# Altium PCB MotorDriverBoard.PcbDoc (part 1 of 2)
Units mm, origin at the board's own origin, x right, y up, seen from the top; angles counter-clockwise.
Board outline 100 x 50 mm, 2 copper layers (Top Layer, Bottom Layer), stack 1.571 mm thick; 192 components, 176 nets, 653 pads, 1194 vias.
Unrouted connection lines stored in the file: 1.
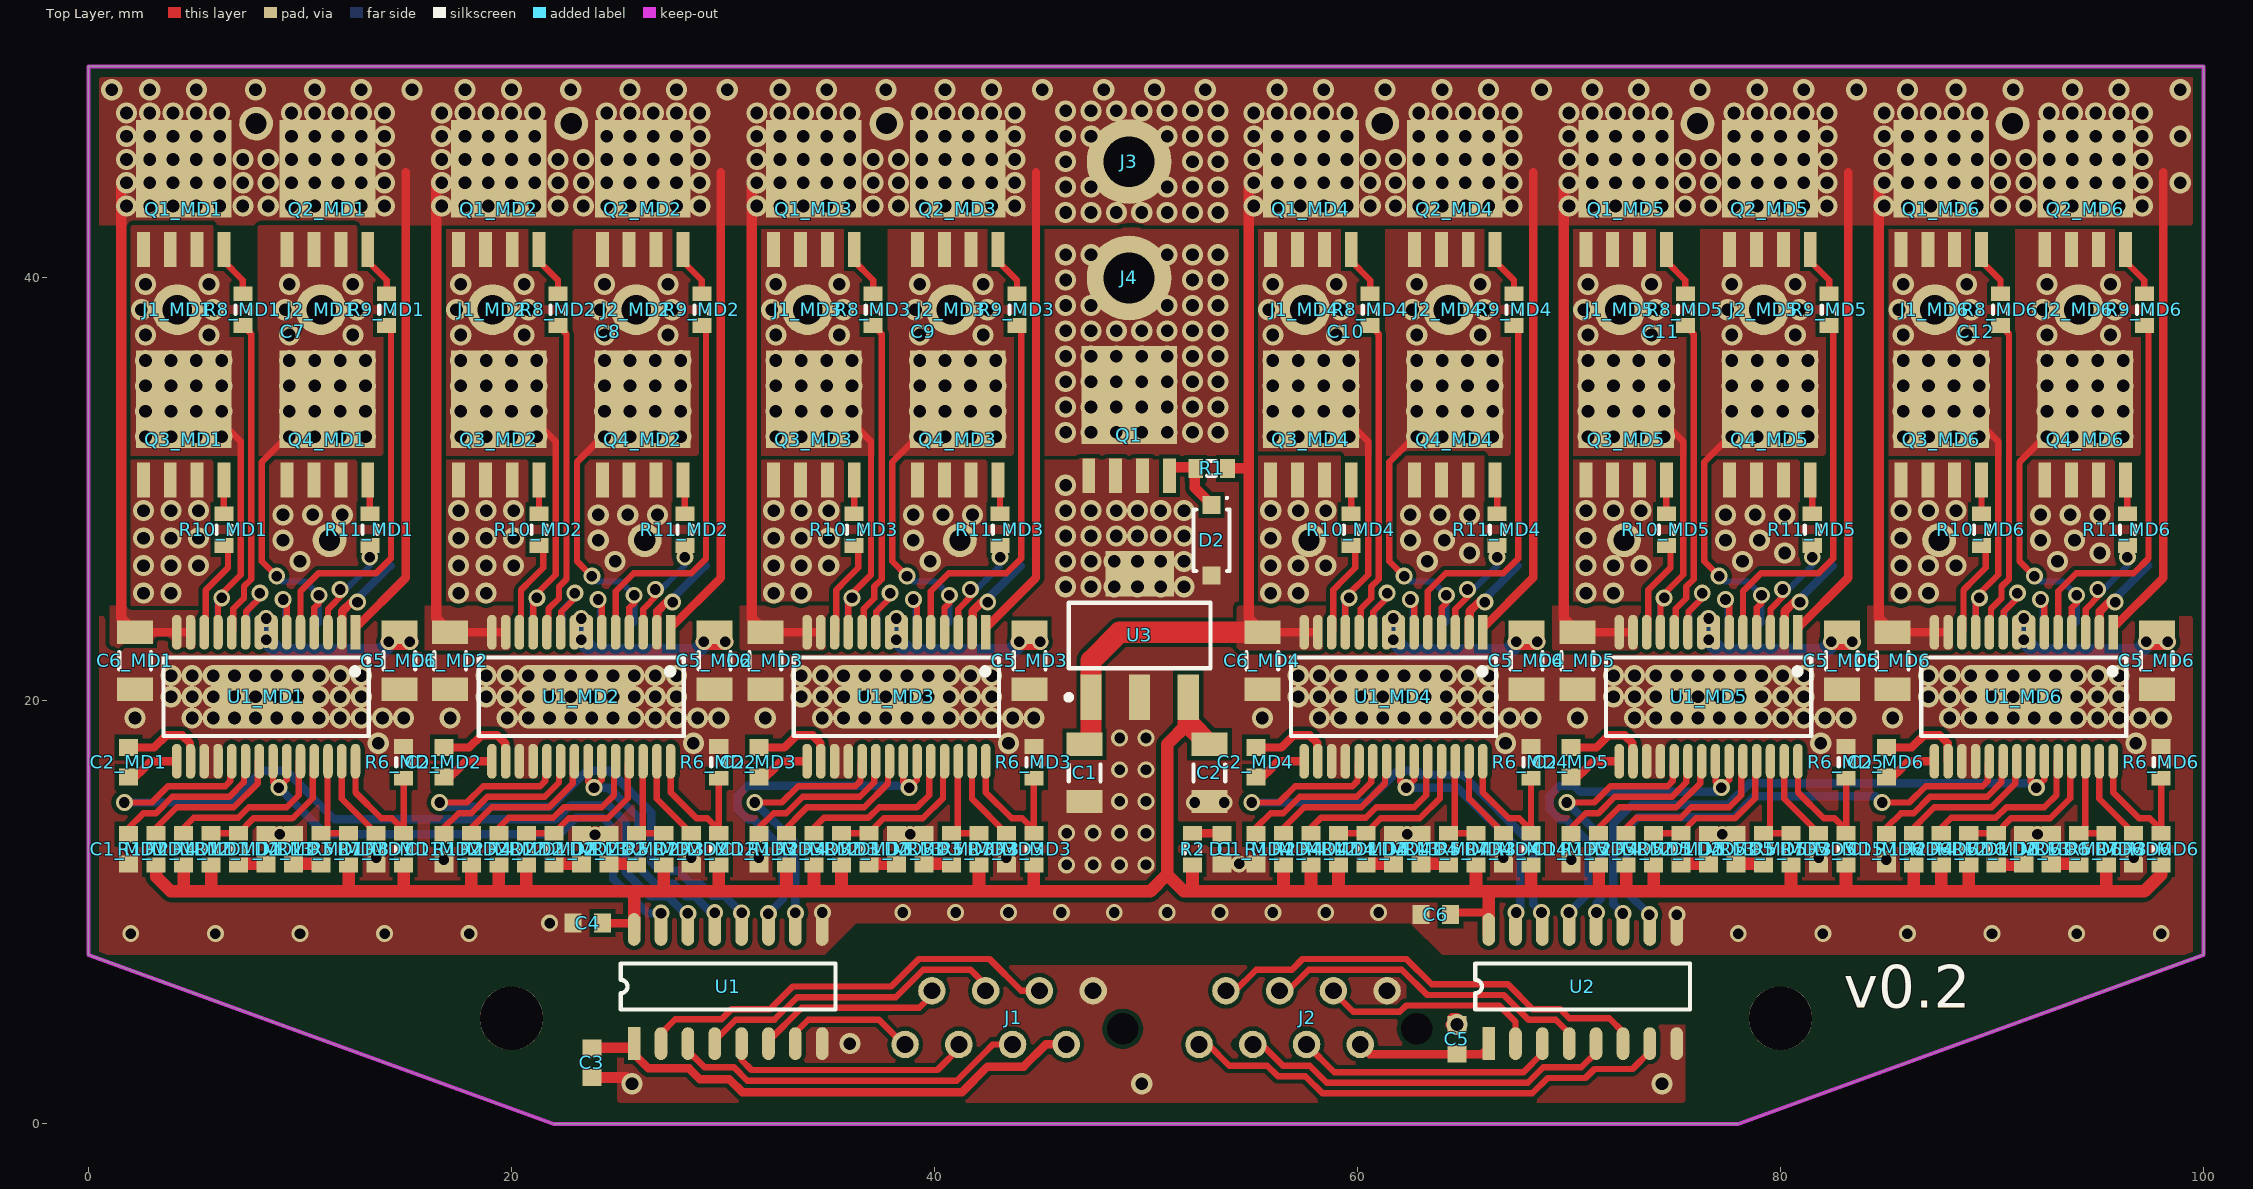
[diagram p0: Top Layer view]
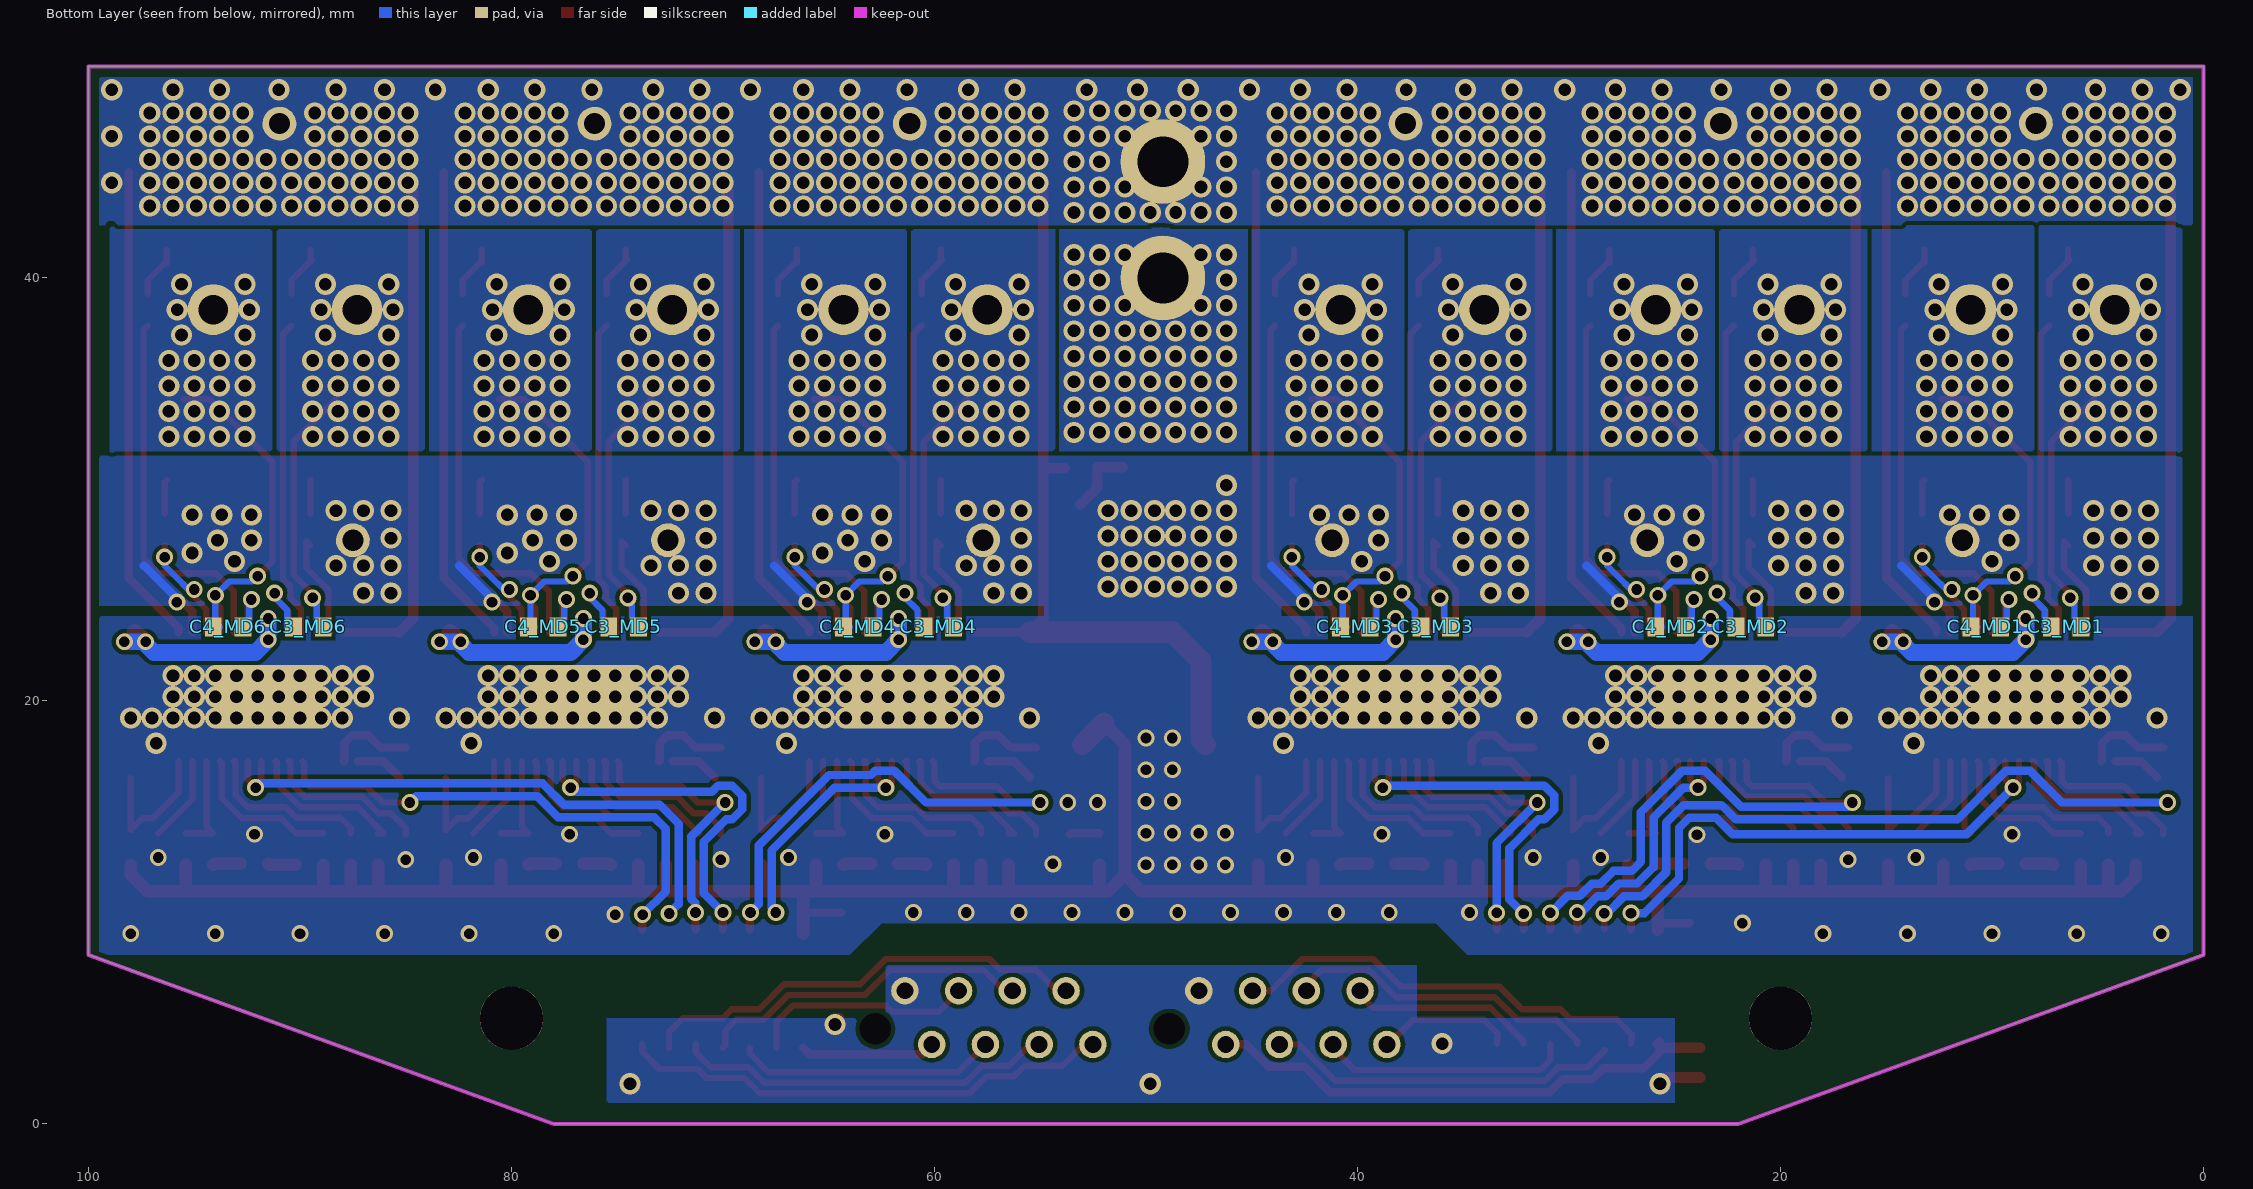
[diagram p1: Bottom Layer view, seen from below]

## Layer stack, top to bottom
Top Solder: solder mask 0.0102, Solder Resist, Dk 3.5
Top Layer: signal copper 0.0356
Dielectric 1: dielectric 1.5, FR-4, Dk 4.8
Bottom Layer: signal copper 0.0356
Bottom Solder: solder mask 0.0102, Solder Resist, Dk 3.5

## Board outline
78,0 100,8 100,50 0,50 0,8 22,0 78,0

## Design rules (kind name [scope] priority, off if disabled: settings)
Clearance Clearance_GND [InNet('GND') vs InNet('GND-EXT')] p1: gap=0.2 except(1: Poly-Poly Fill-Fill Fill-Poly)
Clearance [All] p2: gap=0.2
HoleSize [All] p1: absolutevalues=TRUE maxlimit=3 minlimit=0.4 maxpercent=80.000 minpercent=20.000
HoleToHoleClearance [All] p1: gap=0.2 allowstackedmicrovias=TRUE
MinimumSolderMaskSliver [All] p1: minsoldermaskwidth=0.2
PlaneConnect [All] p1: planeconnectstyle=Direct reliefexpansion=0.508 reliefentries=4 reliefconductorwidth=0.254 reliefairgap=0.254
PolygonConnect [All] p1: connectstyle=Direct reliefconductorwidth=0.254 reliefentries=4 polygonreliefangle="90 Angle" airgapwidth=0.254
RoomDefinition MotorDrivers [InComponentClass('MotorDrivers')] p1: confinementstyle=ConfineIn formatcopy=TRUE lockcomponents=FALSE outline 0,0 100,0 100,50 0,50
RoomDefinition MD6 [InComponentClass('MD6')] p2: confinementstyle=ConfineIn formatcopy=TRUE lockcomponents=FALSE outline 84.1,11.7 99,11.7 99,49 84.1,49
RoomDefinition MD5 [InComponentClass('MD5')] p3: confinementstyle=ConfineIn formatcopy=TRUE lockcomponents=FALSE outline 69.2,11.7 84.1,11.7 84.1,49 69.2,49
RoomDefinition MD4 [InComponentClass('MD4')] p4: confinementstyle=ConfineIn formatcopy=TRUE lockcomponents=FALSE outline 54.3,11.7 69.2,11.7 69.2,48.9 54.3,48.9
RoomDefinition MD3 [InComponentClass('MD3')] p5: confinementstyle=ConfineIn formatcopy=TRUE lockcomponents=FALSE outline 30.8,49 30.8,11.7 45.7,11.7 45.7,49
RoomDefinition MD2 [InComponentClass('MD2')] p6: confinementstyle=ConfineIn formatcopy=TRUE lockcomponents=FALSE outline 15.9,49 15.9,11.7 30.8,11.7 30.8,49
RoomDefinition MD1 [InComponentClass('MD1')] p7: confinementstyle=ConfineIn formatcopy=TRUE lockcomponents=FALSE outline 1,49 1,11.7 15.9,11.7 15.9,49
RoutingVias [All] p1: holewidth=0.4 width=0.8 viastyle="Through Hole" minholewidth=0.4 minwidth=0.8 maxholewidth=1 maxwidth=2
SolderMaskExpansion SolderMaskExpansion_Via [IsVia And (Not IsTestpoint)] p1: expansion=-5
SolderMaskExpansion [All] p2: expansion=0.1
UnpouredPolygon [All] p1: allowunpoured=FALSE
Width Width_Power [(InNet('GND') OR InNet('VCC'))] p1: maxlimit=1 minlimit=0.3 preferedwidth=0.5 minimp=50.000000 maximp=50.000000 favimp=50.000000
Width [All] p2: maxlimit=1 minlimit=0.3 preferedwidth=0.4 minimp=50.000000 maximp=50.000000 favimp=50.000000
25 further rules are at their usual default settings.

## Classes and differential pairs
channel class SingleDriver: MD1 MD2 MD3 MD4 MD5 MD6
component class MotorDrivers: C1 C2 C3 C4 C5 C6 C7 C8 C9 C10 C11 C12 D1 D2 J1 J2 J3 J4 Q1 R1 R2 U1 U2 U3
component class MD6: C1_MD6 C2_MD6 C3_MD6 C4_MD6 C5_MD6 C6_MD6 D1_MD6 D2_MD6 J1_MD6 J2_MD6 Q1_MD6 Q2_MD6 Q3_MD6 Q4_MD6 R1_MD6 R2_MD6 R3_MD6 R4_MD6 R5_MD6 R6_MD6 R7_MD6 R8_MD6 R9_MD6 R10_MD6 R11_MD6 R12_MD6 R13_MD6 U1_MD6
component class MD5: C1_MD5 C2_MD5 C3_MD5 C4_MD5 C5_MD5 C6_MD5 D1_MD5 D2_MD5 J1_MD5 J2_MD5 Q1_MD5 Q2_MD5 Q3_MD5 Q4_MD5 R1_MD5 R2_MD5 R3_MD5 R4_MD5 R5_MD5 R6_MD5 R7_MD5 R8_MD5 R9_MD5 R10_MD5 R11_MD5 R12_MD5 R13_MD5 U1_MD5
component class MD4: C1_MD4 C2_MD4 C3_MD4 C4_MD4 C5_MD4 C6_MD4 D1_MD4 D2_MD4 J1_MD4 J2_MD4 Q1_MD4 Q2_MD4 Q3_MD4 Q4_MD4 R1_MD4 R2_MD4 R3_MD4 R4_MD4 R5_MD4 R6_MD4 R7_MD4 R8_MD4 R9_MD4 R10_MD4 R11_MD4 R12_MD4 R13_MD4 U1_MD4
component class MD3: C1_MD3 C2_MD3 C3_MD3 C4_MD3 C5_MD3 C6_MD3 D1_MD3 D2_MD3 J1_MD3 J2_MD3 Q1_MD3 Q2_MD3 Q3_MD3 Q4_MD3 R1_MD3 R2_MD3 R3_MD3 R4_MD3 R5_MD3 R6_MD3 R7_MD3 R8_MD3 R9_MD3 R10_MD3 R11_MD3 R12_MD3 R13_MD3 U1_MD3
component class MD2: C1_MD2 C2_MD2 C3_MD2 C4_MD2 C5_MD2 C6_MD2 D1_MD2 D2_MD2 J1_MD2 J2_MD2 Q1_MD2 Q2_MD2 Q3_MD2 Q4_MD2 R1_MD2 R2_MD2 R3_MD2 R4_MD2 R5_MD2 R6_MD2 R7_MD2 R8_MD2 R9_MD2 R10_MD2 R11_MD2 R12_MD2 R13_MD2 U1_MD2
component class MD1: C1_MD1 C2_MD1 C3_MD1 C4_MD1 C5_MD1 C6_MD1 D1_MD1 D2_MD1 J1_MD1 J2_MD1 Q1_MD1 Q2_MD1 Q3_MD1 Q4_MD1 R1_MD1 R2_MD1 R3_MD1 R4_MD1 R5_MD1 R6_MD1 R7_MD1 R8_MD1 R9_MD1 R10_MD1 R11_MD1 R12_MD1 R13_MD1 U1_MD1

## Components (designator, comment, footprint, x,y, rotation, side; value= is the part's Value field where it differs from the comment)
C1 "4.7uF" C1206 47.1,16.6 r90 top
C1_MD1 "100nF" 1608[0603] 1.9,13 r90 top (schematic designator C1)
C1_MD2 "100nF" 1608[0603] 16.8,13 r90 top (schematic designator C1)
C1_MD3 "100nF" 1608[0603] 31.7,13 r90 top (schematic designator C1)
C1_MD4 "100nF" 1608[0603] 55.2,13 r90 top (schematic designator C1)
C1_MD5 "100nF" 1608[0603] 70.1,13 r90 top (schematic designator C1)
C1_MD6 "100nF" 1608[0603] 85,13 r90 top (schematic designator C1)
C2 "4.7uF" C1206 53,16.6 r90 top
C2_MD1 "470nF" 1608[0603] 1.9,17.1 r270 top (schematic designator C2)
C2_MD2 "470nF" 1608[0603] 16.8,17.1 r270 top (schematic designator C2)
C2_MD3 "470nF" 1608[0603] 31.7,17.1 r270 top (schematic designator C2)
C2_MD4 "470nF" 1608[0603] 55.2,17.1 r270 top (schematic designator C2)
C2_MD5 "470nF" 1608[0603] 70.1,17.1 r270 top (schematic designator C2)
C2_MD6 "470nF" 1608[0603] 85,17.1 r270 top (schematic designator C2)
C3 "100nF" 1608[0603] 23.8,2.9 r270 top
C3_MD1 "100nF" 1608[0603] 6.5,23.5 r180 bottom (schematic designator C3)
C3_MD2 "100nF" 1608[0603] 21.4,23.5 r180 bottom (schematic designator C3)
C3_MD3 "100nF" 1608[0603] 36.3,23.5 r180 bottom (schematic designator C3)
C3_MD4 "100nF" 1608[0603] 59.8,23.5 r180 bottom (schematic designator C3)
C3_MD5 "100nF" 1608[0603] 74.7,23.5 r180 bottom (schematic designator C3)
C3_MD6 "100nF" 1608[0603] 89.6,23.5 r180 bottom (schematic designator C3)
C4 "100nF" 1608[0603] 23.6,9.5 r180 top
C4_MD1 "100nF" 1608[0603] 10.3,23.5 r0 bottom (schematic designator C4)
C4_MD2 "100nF" 1608[0603] 25.2,23.5 r0 bottom (schematic designator C4)
C4_MD3 "100nF" 1608[0603] 40.1,23.5 r0 bottom (schematic designator C4)
C4_MD4 "100nF" 1608[0603] 63.6,23.5 r0 bottom (schematic designator C4)
C4_MD5 "100nF" 1608[0603] 78.5,23.5 r0 bottom (schematic designator C4)
C4_MD6 "100nF" 1608[0603] 93.4,23.5 r0 bottom (schematic designator C4)
C5 "100nF" 1608[0603] 64.7,4 r90 top
C5_MD1 "10uF" C1206 14.7,21.9 r90 top (schematic designator C5)
C5_MD2 "10uF" C1206 29.6,21.9 r90 top (schematic designator C5)
C5_MD3 "10uF" C1206 44.5,21.9 r90 top (schematic designator C5)
C5_MD4 "10uF" C1206 68,21.9 r90 top (schematic designator C5)
C5_MD5 "10uF" C1206 82.9,21.9 r90 top (schematic designator C5)
C5_MD6 "10uF" C1206 97.8,21.9 r90 top (schematic designator C5)
C6 "100nF" 1608[0603] 63.7,9.9 r180 top
C6_MD1 "10uF" C1206 2.2,21.9 r270 top (schematic designator C6)
C6_MD2 "10uF" C1206 17.1,21.9 r270 top (schematic designator C6)
C6_MD3 "10uF" C1206 32,21.9 r270 top (schematic designator C6)
C6_MD4 "10uF" C1206 55.5,21.9 r270 top (schematic designator C6)
C6_MD5 "10uF" C1206 70.4,21.9 r270 top (schematic designator C6)
C6_MD6 "10uF" C1206 85.3,21.9 r270 top (schematic designator C6)
C7 "1000uF" cap_radial_20 11.4,27.6 r100 top
C8 "1000uF" cap_radial_20 26.3,27.6 r100 top
C9 "1000uF" cap_radial_20 41.2,27.6 r100 top
C10 "1000uF" cap_radial_20 57.7,27.6 r80 top
C11 "1000uF" cap_radial_20 72.6,27.6 r80 top
C12 "1000uF" cap_radial_20 87.5,27.6 r80 top
D1 "LED2" 1608[0603] 53.6,13 r90 top
D1_MD1 "LED2" 1608[0603] 8.4,13 r270 top (schematic designator D1)
D1_MD2 "LED2" 1608[0603] 23.3,13 r270 top (schematic designator D1)
D1_MD3 "LED2" 1608[0603] 38.2,13 r270 top (schematic designator D1)
D1_MD4 "LED2" 1608[0603] 61.7,13 r270 top (schematic designator D1)
D1_MD5 "LED2" 1608[0603] 76.6,13 r270 top (schematic designator D1)
D1_MD6 "LED2" 1608[0603] 91.5,13 r270 top (schematic designator D1)
D2 "ZENER" SODFL370X135-2N 53.1,27.6 r270 top
D2_MD1 "LED2" 1608[0603] 9.7,13 r270 top (schematic designator D2)
D2_MD2 "LED2" 1608[0603] 24.6,13 r270 top (schematic designator D2)
D2_MD3 "LED2" 1608[0603] 39.5,13 r270 top (schematic designator D2)
D2_MD4 "LED2" 1608[0603] 63,13 r270 top (schematic designator D2)
D2_MD5 "LED2" 1608[0603] 77.9,13 r270 top (schematic designator D2)
D2_MD6 "LED2" 1608[0603] 92.8,13 r270 top (schematic designator D2)
J1 "HEADER-8" MICRO-MATCH-8 47.5,6.3 r0 top
J1_MD1 "M1" POWER-VIA#1 4.2,38.5 r90 top (schematic designator J1)
J1_MD2 "M1" POWER-VIA#1 19.1,38.5 r90 top (schematic designator J1)
J1_MD3 "M1" POWER-VIA#1 34,38.5 r90 top (schematic designator J1)
J1_MD4 "M1" POWER-VIA#1 57.5,38.5 r90 top (schematic designator J1)
J1_MD5 "M1" POWER-VIA#1 72.4,38.5 r90 top (schematic designator J1)
J1_MD6 "M1" POWER-VIA#1 87.3,38.5 r90 top (schematic designator J1)
J2 "HEADER-8" MICRO-MATCH-8 61.4,6.3 r0 top
J2_MD1 "M1" POWER-VIA#2 11,38.6 r90 top (schematic designator J2)
J2_MD2 "M1" POWER-VIA#1 25.9,38.5 r90 top (schematic designator J2)
J2_MD3 "M1" POWER-VIA#1 40.8,38.5 r90 top (schematic designator J2)
J2_MD4 "M1" POWER-VIA#1 64.3,38.5 r90 top (schematic designator J2)
J2_MD5 "M1" POWER-VIA#1 79.2,38.5 r90 top (schematic designator J2)
J2_MD6 "M1" POWER-VIA#1 94.1,38.5 r90 top (schematic designator J2)
J3 "BAT_VCC" HIGH-POWER-VIA#1 49.3,45.5 r0 top
J4 "BAT_GND" HIGH-POWER-VIA#2 49.2,40 r0 top
Q1 "MOSFET-N" SOT669 49.2,33.3 r90 top
Q1_MD1 "MOSFET-N" SOT669 4.5,44 r90 top (schematic designator Q1)
Q1_MD2 "MOSFET-N" SOT669 19.4,44 r90 top (schematic designator Q1)
Q1_MD3 "MOSFET-N" SOT669 34.3,44 r90 top (schematic designator Q1)
Q1_MD4 "MOSFET-N" SOT669 57.8,44 r90 top (schematic designator Q1)
Q1_MD5 "MOSFET-N" SOT669 72.7,44 r90 top (schematic designator Q1)
Q1_MD6 "MOSFET-N" SOT669 87.6,44 r90 top (schematic designator Q1)
Q2_MD1 "MOSFET-N" SOT669 11.3,44 r90 top (schematic designator Q2)
Q2_MD2 "MOSFET-N" SOT669 26.2,44 r90 top (schematic designator Q2)
Q2_MD3 "MOSFET-N" SOT669 41.1,44 r90 top (schematic designator Q2)
Q2_MD4 "MOSFET-N" SOT669 64.6,44 r90 top (schematic designator Q2)
Q2_MD5 "MOSFET-N" SOT669 79.5,44 r90 top (schematic designator Q2)
Q2_MD6 "MOSFET-N" SOT669 94.4,44 r90 top (schematic designator Q2)
Q3_MD1 "MOSFET-N" SOT669 4.5,33.1 r90 top (schematic designator Q3)
Q3_MD2 "MOSFET-N" SOT669 19.4,33.1 r90 top (schematic designator Q3)
Q3_MD3 "MOSFET-N" SOT669 34.3,33.1 r90 top (schematic designator Q3)
Q3_MD4 "MOSFET-N" SOT669 57.8,33.1 r90 top (schematic designator Q3)
Q3_MD5 "MOSFET-N" SOT669 72.7,33.1 r90 top (schematic designator Q3)
Q3_MD6 "MOSFET-N" SOT669 87.6,33.1 r90 top (schematic designator Q3)
Q4_MD1 "MOSFET-N" SOT669 11.3,33.1 r90 top (schematic designator Q4)
Q4_MD2 "MOSFET-N" SOT669 26.2,33.1 r90 top (schematic designator Q4)
Q4_MD3 "MOSFET-N" SOT669 41.1,33.1 r90 top (schematic designator Q4)
Q4_MD4 "MOSFET-N" SOT669 64.6,33.1 r90 top (schematic designator Q4)
Q4_MD5 "MOSFET-N" SOT669 79.5,33.1 r90 top (schematic designator Q4)
Q4_MD6 "MOSFET-N" SOT669 94.4,33.1 r90 top (schematic designator Q4)
R1 "100k" J1-0603 53.1,31 r0 top
R1_MD1 "10k" J1-0603 3.2,13 r270 top (schematic designator R1)
R1_MD2 "10k" J1-0603 18.1,13 r270 top (schematic designator R1)
R1_MD3 "10k" J1-0603 33,13 r270 top (schematic designator R1)
R1_MD4 "10k" J1-0603 56.5,13 r270 top (schematic designator R1)
R1_MD5 "10k" J1-0603 71.4,13 r270 top (schematic designator R1)
R1_MD6 "10k" J1-0603 86.3,13 r270 top (schematic designator R1)
R2 "1k" J1-0603 52.2,13 r270 top
R2_MD1 "10k" J1-0603 4.5,13 r270 top (schematic designator R2)
R2_MD2 "10k" J1-0603 19.4,13 r270 top (schematic designator R2)
R2_MD3 "10k" J1-0603 34.3,13 r270 top (schematic designator R2)
R2_MD4 "10k" J1-0603 57.8,13 r270 top (schematic designator R2)
R2_MD5 "10k" J1-0603 72.7,13 r270 top (schematic designator R2)
R2_MD6 "10k" J1-0603 87.6,13 r270 top (schematic designator R2)
R3_MD1 "10k" J1-0603 14.9,13 r270 top (schematic designator R3)
R3_MD2 "10k" J1-0603 29.8,13 r270 top (schematic designator R3)
R3_MD3 "10k" J1-0603 44.7,13 r270 top (schematic designator R3)
R3_MD4 "10k" J1-0603 68.2,13 r270 top (schematic designator R3)
R3_MD5 "10k" J1-0603 83.1,13 r270 top (schematic designator R3)
R3_MD6 "10k" J1-0603 98,13 r270 top (schematic designator R3)
R4_MD1 "10k" J1-0603 5.8,13 r270 top (schematic designator R4)
R4_MD2 "10k" J1-0603 20.7,13 r270 top (schematic designator R4)
R4_MD3 "10k" J1-0603 35.6,13 r270 top (schematic designator R4)
R4_MD4 "10k" J1-0603 59.1,13 r270 top (schematic designator R4)
R4_MD5 "10k" J1-0603 74,13 r270 top (schematic designator R4)
R4_MD6 "10k" J1-0603 88.9,13 r270 top (schematic designator R4)
R5_MD1 "10k" J1-0603 12.3,13 r270 top (schematic designator R5)
R5_MD2 "10k" J1-0603 27.2,13 r270 top (schematic designator R5)
R5_MD3 "10k" J1-0603 42.1,13 r270 top (schematic designator R5)
R5_MD4 "10k" J1-0603 65.6,13 r270 top (schematic designator R5)
R5_MD5 "10k" J1-0603 80.5,13 r270 top (schematic designator R5)
R5_MD6 "10k" J1-0603 95.4,13 r270 top (schematic designator R5)
R6_MD1 "10k" J1-0603 14.9,17.1 r90 top (schematic designator R6)
R6_MD2 "10k" J1-0603 29.8,17.1 r90 top (schematic designator R6)
R6_MD3 "10k" J1-0603 44.7,17.1 r90 top (schematic designator R6)
R6_MD4 "10k" J1-0603 68.2,17.1 r90 top (schematic designator R6)
R6_MD5 "10k" J1-0603 83.1,17.1 r90 top (schematic designator R6)
R6_MD6 "10k" J1-0603 98,17.1 r90 top (schematic designator R6)
R7_MD1 "10k" J1-0603 13.6,13 r270 top (schematic designator R7)
R7_MD2 "10k" J1-0603 28.5,13 r270 top (schematic designator R7)
R7_MD3 "10k" J1-0603 43.4,13 r270 top (schematic designator R7)
R7_MD4 "10k" J1-0603 66.9,13 r270 top (schematic designator R7)
R7_MD5 "10k" J1-0603 81.8,13 r270 top (schematic designator R7)
R7_MD6 "10k" J1-0603 96.7,13 r270 top (schematic designator R7)
R8_MD1 "5.1" J1-0603 7.3,38.5 r90 top (schematic designator R8)
R8_MD2 "5.1" J1-0603 22.2,38.5 r90 top (schematic designator R8)
R8_MD3 "5.1" J1-0603 37.1,38.5 r90 top (schematic designator R8)
R8_MD4 "5.1" J1-0603 60.6,38.5 r90 top (schematic designator R8)
R8_MD5 "5.1" J1-0603 75.5,38.5 r90 top (schematic designator R8)
R8_MD6 "5.1" J1-0603 90.4,38.5 r90 top (schematic designator R8)
R9_MD1 "5.1" J1-0603 14.1,38.5 r90 top (schematic designator R9)
R9_MD2 "5.1" J1-0603 29,38.5 r90 top (schematic designator R9)
R9_MD3 "5.1" J1-0603 43.9,38.5 r90 top (schematic designator R9)
R9_MD4 "5.1" J1-0603 67.4,38.5 r90 top (schematic designator R9)
R9_MD5 "5.1" J1-0603 82.3,38.5 r90 top (schematic designator R9)
R9_MD6 "5.1" J1-0603 97.2,38.5 r90 top (schematic designator R9)
R10_MD1 "5.1" J1-0603 6.4,28.1 r90 top (schematic designator R10)
R10_MD2 "5.1" J1-0603 21.3,28.1 r90 top (schematic designator R10)
R10_MD3 "5.1" J1-0603 36.2,28.1 r90 top (schematic designator R10)
R10_MD4 "5.1" J1-0603 59.7,28.1 r90 top (schematic designator R10)
R10_MD5 "5.1" J1-0603 74.6,28.1 r90 top (schematic designator R10)
R10_MD6 "5.1" J1-0603 89.5,28.1 r90 top (schematic designator R10)
R11_MD1 "5.1" J1-0603 13.3,28.1 r90 top (schematic designator R11)
R11_MD2 "5.1" J1-0603 28.2,28.1 r90 top (schematic designator R11)
R11_MD3 "5.1" J1-0603 43.1,28.1 r90 top (schematic designator R11)
R11_MD4 "5.1" J1-0603 66.6,28.1 r90 top (schematic designator R11)
R11_MD5 "5.1" J1-0603 81.5,28.1 r90 top (schematic designator R11)
R11_MD6 "5.1" J1-0603 96.4,28.1 r90 top (schematic designator R11)
R12_MD1 "1k" J1-0603 7.1,13 r270 top (schematic designator R12)
R12_MD2 "1k" J1-0603 22,13 r270 top (schematic designator R12)
R12_MD3 "1k" J1-0603 36.9,13 r270 top (schematic designator R12)
R12_MD4 "1k" J1-0603 60.4,13 r270 top (schematic designator R12)
R12_MD5 "1k" J1-0603 75.3,13 r270 top (schematic designator R12)
R12_MD6 "1k" J1-0603 90.2,13 r270 top (schematic designator R12)
R13_MD1 "1k" J1-0603 11,13 r90 top (schematic designator R13)
R13_MD2 "1k" J1-0603 25.9,13 r90 top (schematic designator R13)
R13_MD3 "1k" J1-0603 40.8,13 r90 top (schematic designator R13)
R13_MD4 "1k" J1-0603 64.3,13 r90 top (schematic designator R13)
R13_MD5 "1k" J1-0603 79.2,13 r90 top (schematic designator R13)
R13_MD6 "1k" J1-0603 94.1,13 r90 top (schematic designator R13)
U1 "SI8660" SOIC16 25.8,3.8 r90 top
U1_MD1 "a3941" TSSOP28 8.4,20.2 r270 top (schematic designator U1)
U1_MD2 "a3941" TSSOP28 23.3,20.2 r270 top (schematic designator U1)
U1_MD3 "a3941" TSSOP28 38.2,20.2 r270 top (schematic designator U1)
U1_MD4 "a3941" TSSOP28 61.7,20.2 r270 top (schematic designator U1)
U1_MD5 "a3941" TSSOP28 76.6,20.2 r270 top (schematic designator U1)
U1_MD6 "a3941" TSSOP28 91.5,20.2 r270 top (schematic designator U1)
U2 "SI8660" SOIC16 66.2,3.8 r90 top
U3 "MIC5239" SOT230P700X180-4N 49.7,23.1 r90 top

## Footprints (in the part's own frame and the unit in brackets; to place one, negate y for a bottom-side part, rotate by r counter-clockwise, add the part's x,y. Pads: shape width x height; smd on the part's side, far side on the other; paste and mask are expansions set on the pad)
1608[0603] [mm] "Chip Capacitor, Body 1.6x0.8mm, IPC High Density"
  rect 0.8x0.9 smd: 1(-0.7,0) 2(0.7,0)
  body extent -0.87,-0.48 0.87,0.48, height 1.3
C1206 [mm] "Chip Capacitor, Body 3.2x1.6mm, IPC High Density"
  rect 1.1x1.7 smd: 1(-1.35,0) 2(1.35,0)
  silkscreen extent -0.4,-0.75 0.4,0.75, body extent -1.7,-0.9 1.7,0.9, height 1.3
cap_radial_20 [mm]
  round 1.6 hole 1 unplated: 1(0,0) 2(20,0)
  body extent 0,-5 20,4.98, height 14.96
HIGH-POWER-VIA#1 [mm]
  round 4 hole 2.4: 1(-0.1,0)
HIGH-POWER-VIA#2 [mm]
  round 4 hole 2.4: 1(0,0)
J1-0603 [mm] "Chip Resistor, Body 1.6x0.8mm, IPC High Density"
  rect 0.7x0.9 smd: 1(-0.75,0) 2(0.75,0)
  silkscreen extent -0.2,-0.35 0.2,0.35, body extent -0.85,-0.48 0.85,0.48, height 0.9
MICRO-MATCH-8 [mm]
  round 1.3 hole 0.8: 1(0,0) 2(-1.27,-2.54) 3(-2.54,0) 4(-3.81,-2.54) 5(-5.08,0) 6(-6.35,-2.54) 7(-7.62,0) 8(-8.89,-2.54)
  round 0 hole 1.5 unplated: drill(1.4,-1.8)
POWER-VIA#1 [mm]
  round 2.4 hole 1.4: 1(0,0)
POWER-VIA#2 [mm]
  round 2.4 hole 1.4: 1(-0.1,0)
SODFL370X135-2N [mm] "SODFL, 2-Leads, Body 1,55x3,70mm, IPC Medium Density"
  rect 0.85x0.85 smd: 1(-1.675,0) 2(1.675,0)
  silkscreen extent -2.05,-0.85 1.45,0.85, body extent -1.43,-0.85 1.42,0.85, height 1.35
SOIC16 [mm]
  rect 1.55x0.6 smd: 1(0,0)
  oval 1.55x0.6 smd: 2(0,-1.27) 3(0,-2.54) 4(0,-3.81) 5(0,-5.08) 6(0,-6.35) 7(0,-7.62) 8(0,-8.89) 9(5.4,-8.89) 10(5.4,-7.62) 11(5.4,-6.35) 12(5.4,-5.08) 13(5.4,-3.81) 14(5.4,-2.54) 15(5.4,-1.27) 16(5.4,0)
  silkscreen extent 1.61,-9.53 3.79,0.64
SOT230P700X180-4N [mm] "SOT223, 4-Leads, Body 6,50x7,00mm (avg), Pitch 2,30mm, IPC Medium Density"
  rect 2.15x1 smd: 1(-2.925,2.3) 2(-2.925,0) 3(-2.925,-2.3)
  rect 2.15x3.25 smd: 4(2.925,0)
  silkscreen extent -3.05,-3.35 1.55,3.47, body extent -1.85,-3.35 1.85,3.35, height 1.8
SOT669 [mil]
  rect 182x178 smd: D(46,0)
  rect 65x24 smd: G(-104.33,-75) S(-104.33,-25) S(-104.33,25) S(-104.33,75)
TSSOP28 [mm]
  rect 1.65x0.45 smd: 1(-3.05,4.225)
  oval 1.65x0.45 smd: 2(-3.05,3.575) 3(-3.05,2.925) 4(-3.05,2.275) 5(-3.05,1.625) 6(-3.05,0.975) 7(-3.05,0.325) 8(-3.05,-0.325) 9(-3.05,-0.975) 10(-3.05,-1.625) 11(-3.05,-2.275) 12(-3.05,-2.925) 13(-3.05,-3.575) 14(-3.05,-4.225) 15(3.05,-4.225) 16(3.05,-3.575) 17(3.05,-2.925) 18(3.05,-2.275) 19(3.05,-1.625) 20(3.05,-0.975) 21(3.05,-0.325) 22(3.05,0.325) 23(3.05,0.975) 24(3.05,1.625) 25(3.05,2.275) 26(3.05,2.925) 27(3.05,3.575) 28(3.05,4.225)
  rect 3x5 all layers, no hole: 29(0,0)
  silkscreen extent -1.85,-4.85 1.85,4.85

## Part data
C1 C1_MD1 C1_MD2 C1_MD3 C1_MD4 C1_MD5 C1_MD6 C2 C2_MD1 C2_MD2 C2_MD3 C2_MD4 C2_MD5 C2_MD6 C3 C3_MD1 C3_MD2 C3_MD3 C3_MD4 C3_MD5 C3_MD6 C4 C4_MD1 C4_MD2 C4_MD3 C4_MD4 C4_MD5 C4_MD6 C5 C5_MD1 C5_MD2 C5_MD3 C5_MD4 C5_MD5 C5_MD6 C6 C6_MD1 C6_MD2 C6_MD3 C6_MD4 C6_MD5 C6_MD6: library part "Cap Semi", "Capacitor (Semiconductor SIM Model)"
C7 C8 C9 C10 C11 C12: library part cap_pol
D1 D1_MD1 D1_MD2 D1_MD3 D1_MD4 D1_MD5 D1_MD6 D2_MD1 D2_MD2 D2_MD3 D2_MD4 D2_MD5 D2_MD6: "Typical RED, GREEN, YELLOW, AMBER GaAs LED"
D2: library part ZENER-DIODE
J1_MD1 J1_MD2 J1_MD3 J1_MD4 J1_MD5 J1_MD6 J2_MD1 J2_MD2 J2_MD3 J2_MD4 J2_MD5 J2_MD6 J3 J4: library part HEADER-1
R1 R1_MD1 R1_MD2 R1_MD3 R1_MD4 R1_MD5 R1_MD6 R2 R2_MD1 R2_MD2 R2_MD3 R2_MD4 R2_MD5 R2_MD6 R3_MD1 R3_MD2 R3_MD3 R3_MD4 R3_MD5 R3_MD6 R4_MD1 R4_MD2 R4_MD3 R4_MD4 R4_MD5 R4_MD6 R5_MD1 R5_MD2 R5_MD3 R5_MD4 R5_MD5 R5_MD6 R6_MD1 R6_MD2 R6_MD3 R6_MD4 R6_MD5 R6_MD6 R7_MD1 R7_MD2 R7_MD3 R7_MD4 R7_MD5 R7_MD6 R8_MD1 R8_MD2 R8_MD3 R8_MD4 R8_MD5 R8_MD6 R9_MD1 R9_MD2 R9_MD3 R9_MD4 R9_MD5 R9_MD6 R10_MD1 R10_MD2 R10_MD3 R10_MD4 R10_MD5 R10_MD6 R11_MD1 R11_MD2 R11_MD3 R11_MD4 R11_MD5 R11_MD6 R12_MD1 R12_MD2 R12_MD3 R12_MD4 R12_MD5 R12_MD6 R13_MD1 R13_MD2 R13_MD3 R13_MD4 R13_MD5 R13_MD6: library part Res3, "Resistor"

## Free pads (board coordinates)
  round 3 hole 3: drill(20,5) drill(80,5)

## Via types
v1: diameter 1, hole 0.6, Top Layer to Bottom Layer, 1041 vias
v2: diameter 0.8, hole 0.5, Top Layer to Bottom Layer, 153 vias

## Nets (pads, with @x,y where several pads share a name; then routed paths per layer and width w, separated by ;. In a path a pad name is that pad's centre, name@x,y a point inside that pad or via, vN(x,y) a via of type N, cw(c..) or ccw(c..) an arc to the next point about the centre after c; other vN are vias at no path point)
5V: C2.2 C4.1 C6.1 R1_MD1.2 R1_MD2.2 R1_MD3.2 R1_MD4.2 R1_MD5.2 R1_MD6.2 R2.2 R2_MD1.2 R2_MD2.2 R2_MD3.2 R2_MD4.2 R2_MD5.2 R2_MD6.2 R3_MD1.2 R3_MD2.2 R3_MD3.2 R3_MD4.2 R3_MD5.2 R3_MD6.2 R4_MD1.2 R4_MD2.2 R4_MD3.2 R4_MD4.2 R4_MD5.2 R4_MD6.2 R5_MD1.2 R5_MD2.2 R5_MD3.2 R5_MD4.2 R5_MD5.2 R5_MD6.2 U1.16 U2.16 U3.3 | length 150.8
  Top Layer w0.4: C4.1@24.3,9.5 25.7,9.5 U1.16@25.8,9.2 ; C6.1@64.4,10 66.2,10 U2.16@66.2,9
  Top Layer w0.6: R1_MD1.2@3.2,12.25 3.2,11.7 3.9,11 4.5,11 ; R2_MD1.2@4.5,12.25 4.5,11 ; R4_MD1.2@5.8,12.25 5.8,11 ; R5_MD1.2@12.3,12.25 12.3,11 ; R3_MD1.2@14.9,12.25 14.9,11 ; R1_MD2.2@18.1,12.25 18.1,11 ; R2_MD2.2@19.4,12.25 19.4,11 ; R4_MD2.2@20.7,12.25 20.7,11 ; U1.16@25.8,9.2 25.8,11 ; R5_MD2.2@27.2,12.25 27.2,11 ; R3_MD2.2@29.8,12.25 29.8,11 ; R1_MD3.2@33,12.25 33,11 ; R2_MD3.2@34.3,12.25 34.3,11 ; R4_MD3.2@35.6,12.25 35.6,11.1 35.7,11 ; R5_MD3.2@42.1,12.25 42.1,11 ; R3_MD3.2@44.7,12.25 44.7,11 ; 52,18.95 51,17.95 51,11.8 ; R2.2@52.2,12.25 52.2,11.1 52.1,11 ; R1_MD4.2@56.5,12.25 56.5,11 ; R2_MD4.2@57.8,12.25 57.8,11 ; R4_MD4.2@59.1,12.25 59.1,11 ; R5_MD4.2@65.6,12.25 65.6,11.2 65.4,11 ; U2.16@66.2,9 U2.16@66.2,9.2 66.2,11 ; R3_MD4.2@68.2,12.25 68.2,11 ; R1_MD5.2@71.4,12.25 71.4,11 ; R2_MD5.2@72.7,12.25 72.7,11 ; R4_MD5.2@74,12.25 74,11 ; R5_MD5.2@80.5,12.25 80.5,11 ; R3_MD5.2@83.1,12.25 83.1,11.1 83.2,11 ; R1_MD6.2@86.3,12.25 86.3,11 ; R2_MD6.2@87.6,12.25 87.6,11 ; R4_MD6.2@88.9,12.25 88.9,11 ; R5_MD6.2@95.4,12.25 95.4,11 ; R3_MD6.2@98,12.25 98,11.8 97.2,11 95.4,11 ; 4.5,11 5.8,11 ; 5.8,11 8.4,11 9.7,11 12.3,11 ; 12.3,11 14.9,11 ; 14.9,11 18.1,11 ; 18.1,11 19.4,11 ; 19.4,11 20.7,11 ; 20.7,11 23.3,11 24.6,11 25.8,11 ; 25.8,11 27.2,11 ; 27.2,11 29.8,11 ; 29.8,11 33,11 ; 33,11 34.3,11 ; 34.3,11 35.7,11 ; 35.7,11 38.2,11 39.5,11 42.1,11 ; 42.1,11 44.7,11 ; 44.7,11 50.2,11 51,11.8 ; 51,11.8 51.8,11 52.1,11 ; 52.1,11 56.5,11 ; 56.5,11 57.8,11 ; 57.8,11 59.1,11 ; 59.1,11 61.7,11 63,11 65.4,11 ; 65.4,11 66.2,11 ; 66.2,11 68.2,11 ; 68.2,11 71.4,11 ; 71.4,11 72.7,11 ; 72.7,11 74,11 ; 74,11 76.6,11 77.9,11 80.5,11 ; 80.5,11 83.2,11 ; 83.2,11 86.3,11 ; 86.3,11 87.6,11 ; 87.6,11 88.9,11 ; 88.9,11 91.5,11 92.8,11 95.4,11
  Top Layer w1: 52,18.95 C2.2@53,17.95
5V-EXT: C3.1 C5.1 J1.2 J2.2 U1.1 U2.1 | length 31.4
  Top Layer w0.4: U1.1@25.8,3.8 25.7,3.905 25.7,3.4 26.475,2.625 28.397,2.625 28.897,2.125 30.29,2.125 30.915,1.5 41.3,1.5 42.51,2.71 44.21,2.71 45.26,3.76 J1.2@46.23,3.76 ; J2.2@60.13,3.76 60.59,3.3 65.9,3.3 U2.1@66.2,3.6
  Top Layer w0.5: C3.1@23.8,3.6 25.6,3.6 U1.1@25.8,3.8
GND: C1.1 C1_MD1.1 C1_MD2.1 C1_MD3.1 C1_MD4.1 C1_MD5.1 C1_MD6.1 C2.1 C4.2 C5_MD1.1 C5_MD2.1 C5_MD3.1 C5_MD4.1 C5_MD5.1 C5_MD6.1 C6.2 C6_MD1.2 C6_MD2.2 C6_MD3.2 C6_MD4.2 C6_MD5.2 C6_MD6.2 C7.1 C8.1 C9.1 C10.1 C11.1 C12.1 D1.1 D1_MD1.1 D1_MD2.1 D1_MD3.1 D1_MD4.1 D1_MD5.1 D1_MD6.1 D2.2 D2_MD1.1 D2_MD2.1 D2_MD3.1 D2_MD4.1 D2_MD5.1 D2_MD6.1 Q1.S Q3_MD1.S Q3_MD2.S Q3_MD3.S Q3_MD4.S Q3_MD5.S Q3_MD6.S Q4_MD1.S Q4_MD2.S Q4_MD3.S Q4_MD4.S Q4_MD5.S Q4_MD6.S R6_MD1.2 R6_MD2.2 R6_MD3.2 R6_MD4.2 R6_MD5.2 R6_MD6.2 R7_MD1.2 R7_MD2.2 R7_MD3.2 R7_MD4.2 R7_MD5.2 R7_MD6.2 U1.9 U1_MD1.2 U1_MD1.17 U1_MD1.18 U1_MD1.29 U1_MD2.2 U1_MD2.17 U1_MD2.18 U1_MD2.29 U1_MD3.2 U1_MD3.17 U1_MD3.18 U1_MD3.29 U1_MD4.2 U1_MD4.17 U1_MD4.18 U1_MD4.29 U1_MD5.2 U1_MD5.17 U1_MD5.18 U1_MD5.29 U1_MD6.2 U1_MD6.17 U1_MD6.18 U1_MD6.29 U2.9 U3.2 U3.4 | length 25.6
  Top Layer w0.4: U1_MD1.2@11.975,23.25 12,23.275 12,24.241 12.437,24.678 v2(12.72,24.678) ; U1_MD2.2@26.875,23.25 26.9,23.275 26.9,24.241 27.337,24.678 v2(27.62,24.678) ; U1_MD3.2@41.775,23.25 41.8,23.275 41.8,24.241 42.237,24.678 v2(42.52,24.678) ; U1_MD4.2@65.275,23.25 65.3,23.275 65.3,24.241 65.737,24.678 v2(66.02,24.678) ; U1_MD5.2@80.175,23.25 80.2,23.275 80.2,24.241 80.637,24.678 v2(80.92,24.678) ; U1_MD6.2@95.075,23.25 95.1,23.275 95.1,24.241 95.537,24.678 v2(95.82,24.678)
  Bottom Layer w0.4: v2(12.72,24.678) 12.72,24.838 14.281,26.4 ; v2(27.62,24.678) 27.62,24.838 29.181,26.4 ; v2(42.52,24.678) 42.52,24.838 44.081,26.4 ; v2(66.02,24.678) 66.02,24.838 67.581,26.4 ; v2(80.92,24.678) 80.92,24.838 82.481,26.4 ; v2(95.82,24.678) 95.82,24.838 97.381,26.4
  other v1: 13.7,18 28.6,18 43.5,18 67,18 81.9,18 96.8,18 2.2,19.2 4.9,19.2 5.9,19.2 6.9,19.2 7.9,19.2 8.9,19.2 9.9,19.2 10.9,19.2 11.9,19.2 12.9,19.2 13.9,19.2 14.9,19.2 17.1,19.2 19.8,19.2 20.8,19.2 21.8,19.2 22.8,19.2 23.8,19.2 24.8,19.2 25.8,19.2 26.8,19.2 27.8,19.2 28.8,19.2 29.8,19.2 32,19.2 34.7,19.2 35.7,19.2 36.7,19.2 37.7,19.2 38.7,19.2 39.7,19.2 40.7,19.2 41.7,19.2 42.7,19.2 43.7,19.2 44.7,19.2 55.5,19.2 58.2,19.2 59.2,19.2 60.2,19.2 61.2,19.2 62.2,19.2 63.2,19.2 64.2,19.2 65.2,19.2 66.2,19.2 67.2,19.2 68.2,19.2 70.4,19.2 73.1,19.2 74.1,19.2 75.1,19.2 76.1,19.2 77.1,19.2 78.1,19.2 79.1,19.2 80.1,19.2 81.1,19.2 82.1,19.2 83.1,19.2 85.3,19.2 88,19.2 89,19.2 90,19.2 91,19.2 92,19.2 93,19.2 94,19.2 95,19.2 96,19.2 97,19.2 98,19.2 3.9,20.2 4.9,20.2 5.9,20.2 6.9,20.2 7.9,20.2 8.9,20.2 9.9,20.2 10.9,20.2 11.9,20.2 12.9,20.2 18.8,20.2 19.8,20.2 20.8,20.2 21.8,20.2 22.8,20.2 23.8,20.2 24.8,20.2 25.8,20.2 26.8,20.2 27.8,20.2 33.7,20.2 34.7,20.2 35.7,20.2 36.7,20.2 37.7,20.2 38.7,20.2 39.7,20.2 40.7,20.2 41.7,20.2 42.7,20.2 57.2,20.2 58.2,20.2 59.2,20.2 60.2,20.2 61.2,20.2 62.2,20.2 63.2,20.2 64.2,20.2 65.2,20.2 66.2,20.2 72.1,20.2 73.1,20.2 74.1,20.2 75.1,20.2 76.1,20.2 77.1,20.2 78.1,20.2 79.1,20.2 80.1,20.2 81.1,20.2 87,20.2 88,20.2 89,20.2 90,20.2 91,20.2 92,20.2 93,20.2 94,20.2 95,20.2 96,20.2 3.9,21.2 4.9,21.2 5.9,21.2 6.9,21.2 7.9,21.2 8.9,21.2 9.9,21.2 10.9,21.2 11.9,21.2 12.9,21.2 18.8,21.2 19.8,21.2 20.8,21.2 21.8,21.2 22.8,21.2 23.8,21.2 24.8,21.2 25.8,21.2 26.8,21.2 27.8,21.2 33.7,21.2 34.7,21.2 35.7,21.2 36.7,21.2 37.7,21.2 38.7,21.2 39.7,21.2 40.7,21.2 41.7,21.2 42.7,21.2 57.2,21.2 58.2,21.2 59.2,21.2 60.2,21.2 61.2,21.2 62.2,21.2 63.2,21.2 64.2,21.2 65.2,21.2 66.2,21.2 72.1,21.2 73.1,21.2 74.1,21.2 75.1,21.2 76.1,21.2 77.1,21.2 78.1,21.2 79.1,21.2 80.1,21.2 81.1,21.2 87,21.2 88,21.2 89,21.2 90,21.2 91,21.2 92,21.2 93,21.2 94,21.2 95,21.2 96,21.2 2.6,25.1 3.9,25.1 17.5,25.1 18.8,25.1 32.4,25.1 33.7,25.1 55.9,25.1 57.2,25.1 70.8,25.1 72.1,25.1 85.7,25.1 87,25.1 46.2,25.4 47.4,25.4 48.5,25.4 49.6,25.4 50.7,25.4 51.8,25.4 2.6,26.4 3.9,26.4 5.2,26.4 17.5,26.4 18.8,26.4 20.1,26.4 32.4,26.4 33.7,26.4 35,26.4 55.9,26.4 57.2,26.4 58.5,26.4 70.8,26.4 72.1,26.4 73.4,26.4 85.7,26.4 87,26.4 88.3,26.4 10,26.6 24.9,26.6 39.8,26.6 46.2,26.6 47.4,26.6 48.5,26.6 49.6,26.6 50.7,26.6 51.8,26.6 63.3,26.6 78.2,26.6 93.1,26.6 65.3,27 80.2,27 95.1,27 9.2,27.6 24.1,27.6 39,27.6 62.5,27.6 64.1,27.6 77.4,27.6 79,27.6 92.3,27.6 93.9,27.6 2.6,27.7 3.9,27.7 5.2,27.7 17.5,27.7 18.8,27.7 20.1,27.7 32.4,27.7 33.7,27.7 35,27.7 55.9,27.7 70.8,27.7 85.7,27.7 46.2,27.8 47.4,27.8 48.6,27.8 49.6,27.8 50.7,27.8 51.8,27.8 9.2,28.8 10.6,28.8 12,28.8 24.1,28.8 25.5,28.8 26.9,28.8 39,28.8 40.4,28.8 41.8,28.8 62.5,28.8 63.9,28.8 65.3,28.8 77.4,28.8 78.8,28.8 80.2,28.8 92.3,28.8 93.7,28.8 95.1,28.8 2.6,29 3.9,29 5.2,29 17.5,29 18.8,29 20.1,29 32.4,29 33.7,29 35,29 46.2,29 47.4,29 48.6,29 49.6,29 50.7,29 51.8,29 55.9,29 57.2,29 58.5,29 70.8,29 72.1,29 73.4,29 85.7,29 87,29 88.3,29 46.2,30.2
  other v2: 2,9 6,9 10,9 14,9 18,9 78,9 82,9 86,9 90,9 94,9 98,9 21.8,9.5 75.1,9.9 34.7,10 38.5,10 41,10 43.5,10 46,10 48.5,10 51,10 53.5,10 56,10 58.5,10 61,10 46.25,12.25 47.5,12.25 48.75,12.25 50,12.25 54.4,12.3 16.8,12.5 70.1,12.5 85,12.5 13.6,12.6 28.5,12.6 31.7,12.6 43.4,12.6 66.9,12.6 81.8,12.6 96.7,12.6 23.95,13.675 9.05,13.7 38.85,13.7 62.35,13.7 77.25,13.7 92.15,13.7 46.25,13.75 47.5,13.75 48.75,13.75 50,13.75 52.3,15.2 53.7,15.2 48.75,15.25 50,15.25 48.75,16.75 50,16.75 48.75,18.25 50,18.25
GND-EXT: C3.2 C5.2 J1.1 J2.1 U1.8 U2.8 | length 2.6
  Top Layer w0.5: C3.2@23.8,2.2 25.4,2.2 v1(25.7,1.9) ; C5.2@64.4,4.7 64.7,5 C5.2@64.5,5
  other v1: 49.8,1.9 74.4,1.9 36,3.8 64.7,4.7
NetC1_MD1_2: C1_MD1.2 U1_MD1.20 | length 7.7
  Top Layer w0.3: C1_MD1.2@1.9,13.7 1.9,14 2.6,14.7 3.193,14.7 3.968,15.475 6.668,15.475 7.35,16.157 7.35,17.15 U1_MD1.20@7.425,17.15
NetC1_MD2_2: C1_MD2.2 U1_MD2.20 | length 7.7
  Top Layer w0.3: C1_MD2.2@16.8,13.7 16.8,14 17.5,14.7 18.093,14.7 18.868,15.475 21.568,15.475 22.25,16.157 22.25,17.15 U1_MD2.20@22.325,17.15
NetC1_MD3_2: C1_MD3.2 U1_MD3.20 | length 7.7
  Top Layer w0.3: C1_MD3.2@31.7,13.7 31.7,14 32.4,14.7 32.993,14.7 33.768,15.475 36.468,15.475 37.15,16.157 37.15,17.15 U1_MD3.20@37.225,17.15
NetC1_MD4_2: C1_MD4.2 U1_MD4.20 | length 7.7
  Top Layer w0.3: C1_MD4.2@55.2,13.7 55.2,14 55.9,14.7 56.493,14.7 57.268,15.475 59.968,15.475 60.65,16.157 60.65,17.15 U1_MD4.20@60.725,17.15
NetC1_MD5_2: C1_MD5.2 U1_MD5.20 | length 7.7
  Top Layer w0.3: C1_MD5.2@70.1,13.7 70.1,14 70.8,14.7 71.393,14.7 72.168,15.475 74.868,15.475 75.55,16.157 75.55,17.15 U1_MD5.20@75.625,17.15
NetC1_MD6_2: C1_MD6.2 U1_MD6.20 | length 7.7
  Top Layer w0.3: C1_MD6.2@85,13.7 85,14 85.7,14.7 86.293,14.7 87.068,15.475 89.768,15.475 90.45,16.157 90.45,17.15 U1_MD6.20@90.525,17.15
NetC2_MD1_1: C2_MD1.1 U1_MD1.16 | length 4.2
  Top Layer w0.4: C2_MD1.1@1.9,17.8 3.1,17.8 3.675,18.375 4.434,18.375 4.8,18.009 4.8,17.175 U1_MD1.16@4.825,17.15
NetC2_MD1_2: C2_MD1.2 U1_MD1.15 | length 2.3
  Top Layer w0.4: C2_MD1.2@2.2,16.4 2.55,16.75 2.95,17.15 U1_MD1.15@4.175,17.15
NetC2_MD2_1: C2_MD2.1 U1_MD2.16 | length 4.2
  Top Layer w0.4: C2_MD2.1@16.8,17.8 18,17.8 18.575,18.375 19.334,18.375 19.7,18.009 19.7,17.175 U1_MD2.16@19.725,17.15
NetC2_MD2_2: C2_MD2.2 U1_MD2.15 | length 2.3
  Top Layer w0.4: C2_MD2.2@17.1,16.4 17.45,16.75 17.85,17.15 U1_MD2.15@19.075,17.15
NetC2_MD3_1: C2_MD3.1 U1_MD3.16 | length 4.2
  Top Layer w0.4: C2_MD3.1@31.7,17.8 32.9,17.8 33.475,18.375 34.234,18.375 34.6,18.009 34.6,17.175 U1_MD3.16@34.625,17.15
NetC2_MD3_2: C2_MD3.2 U1_MD3.15 | length 2.3
  Top Layer w0.4: C2_MD3.2@32,16.4 32.35,16.75 32.75,17.15 U1_MD3.15@33.975,17.15
NetC2_MD4_1: C2_MD4.1 U1_MD4.16 | length 4.2
  Top Layer w0.4: C2_MD4.1@55.2,17.8 56.4,17.8 56.975,18.375 57.734,18.375 58.1,18.009 58.1,17.175 U1_MD4.16@58.125,17.15
NetC2_MD4_2: C2_MD4.2 U1_MD4.15 | length 2.3
  Top Layer w0.4: C2_MD4.2@55.5,16.4 55.85,16.75 56.25,17.15 U1_MD4.15@57.475,17.15
NetC2_MD5_1: C2_MD5.1 U1_MD5.16 | length 4.2
  Top Layer w0.4: C2_MD5.1@70.1,17.8 71.3,17.8 71.875,18.375 72.634,18.375 73,18.009 73,17.175 U1_MD5.16@73.025,17.15
NetC2_MD5_2: C2_MD5.2 U1_MD5.15 | length 2.3
  Top Layer w0.4: C2_MD5.2@70.4,16.4 70.75,16.75 71.15,17.15 U1_MD5.15@72.375,17.15
NetC2_MD6_1: C2_MD6.1 U1_MD6.16 | length 4.2
  Top Layer w0.4: C2_MD6.1@85,17.8 86.2,17.8 86.775,18.375 87.534,18.375 87.9,18.009 87.9,17.175 U1_MD6.16@87.925,17.15
NetC2_MD6_2: C2_MD6.2 U1_MD6.15 | length 2.3
  Top Layer w0.4: C2_MD6.2@85.3,16.4 85.65,16.75 86.05,17.15 U1_MD6.15@87.275,17.15
NetC3_MD1_1: C3_MD1.1 U1_MD1.9 | length 4.5
  Top Layer w0.3: U1_MD1.9@7.425,23.25 7.45,23.275 7.45,24.223 8.327,25.1 v2(8.1,25.1)
  Bottom Layer w0.3: C3_MD1.1@7.5,23.5 7.5,24.3 8.1,24.9 v2(8.1,25.1) ; v2@8.2,24.979 v2@8.2,25.2
NetC3_MD1_2: C3_MD1.2 J1_MD1.1 Q1_MD1.S Q3_MD1.D U1_MD1.11 | length 13.8
  Top Layer w0.3: Q3_MD1.D@5.2,34.268 7.2,32.268 7.2,25.968 6.3,25.068 v2(6.3,24.875) 6.125,24.7 U1_MD1.11@6.125,23.25
  Bottom Layer w0.3: C3_MD1.2@6.1,23.5 6.1,24.693 v2@6.307,24.9 ; v2(6.3,24.875) v2@6.3,24.893
  other v1: 2.7,32.5 3.9,32.5 5.1,32.5 6.3,32.5 2.7,33.7 3.9,33.7 5.1,33.7 6.3,33.7 2.7,34.9 3.9,34.9 5.1,34.9 6.3,34.9 2.7,36.1 3.9,36.1 5.1,36.1 6.3,36.1 2.7,37.3 5.7,37.3 2.5,38.5 5.9,38.5 2.7,39.7 5.7,39.7
NetC3_MD2_1: C3_MD2.1 U1_MD2.9 | length 4.5
  Top Layer w0.3: U1_MD2.9@22.325,23.25 22.35,23.275 22.35,24.223 23.227,25.1 v2(23,25.1)
  Bottom Layer w0.3: C3_MD2.1@22.4,23.5 22.4,24.3 23,24.9 v2(23,25.1) ; v2@23.1,24.979 v2@23.1,25.2
NetC3_MD2_2: C3_MD2.2 J1_MD2.1 Q1_MD2.S Q3_MD2.D U1_MD2.11 | length 13.8
  Top Layer w0.3: Q3_MD2.D@20.1,34.268 22.1,32.268 22.1,25.968 21.2,25.068 v2(21.2,24.875) 21.025,24.7 U1_MD2.11@21.025,23.25
  Bottom Layer w0.3: C3_MD2.2@21,23.5 21,24.693 v2@21.207,24.9 ; v2(21.2,24.875) v2@21.2,24.893
  other v1: 17.6,32.5 18.8,32.5 20,32.5 21.2,32.5 17.6,33.7 18.8,33.7 20,33.7 21.2,33.7 17.6,34.9 18.8,34.9 20,34.9 21.2,34.9 17.6,36.1 18.8,36.1 20,36.1 21.2,36.1 17.6,37.3 20.6,37.3 17.4,38.5 20.8,38.5 17.6,39.7 20.6,39.7
NetC3_MD3_1: C3_MD3.1 U1_MD3.9 | length 4.5
  Top Layer w0.3: U1_MD3.9@37.225,23.25 37.25,23.275 37.25,24.223 38.127,25.1 v2(37.9,25.1)
  Bottom Layer w0.3: C3_MD3.1@37.3,23.5 37.3,24.3 37.9,24.9 v2(37.9,25.1) ; v2@38,24.979 v2@38,25.2
NetC3_MD3_2: C3_MD3.2 J1_MD3.1 Q1_MD3.S Q3_MD3.D U1_MD3.11 | length 13.8
  Top Layer w0.3: Q3_MD3.D@35,34.268 37,32.268 37,25.968 36.1,25.068 v2(36.1,24.875) 35.925,24.7 U1_MD3.11@35.925,23.25
  Bottom Layer w0.3: C3_MD3.2@35.9,23.5 35.9,24.693 v2@36.107,24.9 ; v2(36.1,24.875) v2@36.1,24.893
  other v1: 32.5,32.5 33.7,32.5 34.9,32.5 36.1,32.5 32.5,33.7 33.7,33.7 34.9,33.7 36.1,33.7 32.5,34.9 33.7,34.9 34.9,34.9 36.1,34.9 32.5,36.1 33.7,36.1 34.9,36.1 36.1,36.1 32.5,37.3 35.5,37.3 32.3,38.5 35.7,38.5 32.5,39.7 35.5,39.7
NetC3_MD4_1: C3_MD4.1 U1_MD4.9 | length 4.5
  Top Layer w0.3: U1_MD4.9@60.725,23.25 60.75,23.275 60.75,24.223 61.627,25.1 v2(61.4,25.1)
  Bottom Layer w0.3: C3_MD4.1@60.8,23.5 60.8,24.3 61.4,24.9 v2(61.4,25.1) ; v2@61.5,24.979 v2@61.5,25.2
NetC3_MD4_2: C3_MD4.2 J1_MD4.1 Q1_MD4.S Q3_MD4.D U1_MD4.11 | length 13.8
  Top Layer w0.3: Q3_MD4.D@58.5,34.268 60.5,32.268 60.5,25.968 59.6,25.068 v2(59.6,24.875) 59.425,24.7 U1_MD4.11@59.425,23.25
  Bottom Layer w0.3: C3_MD4.2@59.4,23.5 59.4,24.693 v2@59.607,24.9 ; v2(59.6,24.875) v2@59.6,24.893
  other v1: 56,32.5 57.2,32.5 58.4,32.5 59.6,32.5 56,33.7 57.2,33.7 58.4,33.7 59.6,33.7 56,34.9 57.2,34.9 58.4,34.9 59.6,34.9 56,36.1 57.2,36.1 58.4,36.1 59.6,36.1 56,37.3 59,37.3 55.8,38.5 59.2,38.5 56,39.7 59,39.7
NetC3_MD5_1: C3_MD5.1 U1_MD5.9 | length 4.5
  Top Layer w0.3: U1_MD5.9@75.625,23.25 75.65,23.275 75.65,24.223 76.527,25.1 v2(76.3,25.1)
  Bottom Layer w0.3: C3_MD5.1@75.7,23.5 75.7,24.3 76.3,24.9 v2(76.3,25.1) ; v2@76.4,24.979 v2@76.4,25.2
NetC3_MD5_2: C3_MD5.2 J1_MD5.1 Q1_MD5.S Q3_MD5.D U1_MD5.11 | length 13.8
  Top Layer w0.3: Q3_MD5.D@73.4,34.268 75.4,32.268 75.4,25.968 74.5,25.068 v2(74.5,24.875) 74.325,24.7 U1_MD5.11@74.325,23.25
  Bottom Layer w0.3: C3_MD5.2@74.3,23.5 74.3,24.693 v2@74.507,24.9 ; v2(74.5,24.875) v2@74.5,24.893
  other v1: 70.9,32.5 72.1,32.5 73.3,32.5 74.5,32.5 70.9,33.7 72.1,33.7 73.3,33.7 74.5,33.7 70.9,34.9 72.1,34.9 73.3,34.9 74.5,34.9 70.9,36.1 72.1,36.1 73.3,36.1 74.5,36.1 70.9,37.3 73.9,37.3 70.7,38.5 74.1,38.5 70.9,39.7 73.9,39.7
NetC3_MD6_1: C3_MD6.1 U1_MD6.9 | length 4.5
  Top Layer w0.3: U1_MD6.9@90.525,23.25 90.55,23.275 90.55,24.223 91.427,25.1 v2(91.2,25.1)
  Bottom Layer w0.3: C3_MD6.1@90.6,23.5 90.6,24.3 91.2,24.9 v2(91.2,25.1) ; v2@91.3,24.979 v2@91.3,25.2
NetC3_MD6_2: C3_MD6.2 J1_MD6.1 Q1_MD6.S Q3_MD6.D U1_MD6.11 | length 13.8
  Top Layer w0.3: Q3_MD6.D@88.3,34.268 90.3,32.268 90.3,25.968 89.4,25.068 v2(89.4,24.875) 89.225,24.7 U1_MD6.11@89.225,23.25
  Bottom Layer w0.3: C3_MD6.2@89.2,23.5 89.2,24.693 v2@89.407,24.9 ; v2(89.4,24.875) v2@89.4,24.893
  other v1: 85.8,32.5 87,32.5 88.2,32.5 89.4,32.5 85.8,33.7 87,33.7 88.2,33.7 89.4,33.7 85.8,34.9 87,34.9 88.2,34.9 89.4,34.9 85.8,36.1 87,36.1 88.2,36.1 89.4,36.1 85.8,37.3 88.8,37.3 85.6,38.5 89,38.5 85.8,39.7 88.8,39.7
NetC4_MD1_1: C4_MD1.1 U1_MD1.6 | length 3.2
  Top Layer w0.3: v2(9.2,24.8) 9.4,24.8 9.375,24.825 U1_MD1.6@9.375,23.25
  Bottom Layer w0.3: v2(9.2,24.8) 9.3,24.8 C4_MD1.1@9.3,23.5
NetC4_MD1_2: C4_MD1.2 J2_MD1.1 Q2_MD1.S Q4_MD1.D U1_MD1.4 | length 16.9
  Top Layer w0.3: v2(8.9,25.9) 8.2,26.6 8.2,31.3 11.168,34.268 Q4_MD1.D@11.3,34.268 Q4_MD1.D@12.4,34.268 ; U1_MD1.4@10.675,23.25 10.675,24.401 10.9,24.626 v2(10.9,25)
  Bottom Layer w0.3: v2(8.9,25.9) 9.15,25.65 10.25,25.65 v2(10.9,25) 10.9,23.7 C4_MD1.2@10.7,23.5
  other v1: 9.5,32.5 10.7,32.5 11.9,32.5 13.1,32.5 9.5,33.7 10.7,33.7 11.9,33.7 13.1,33.7 9.5,34.9 10.7,34.9 11.9,34.9 13.1,34.9 9.5,36.1 10.7,36.1 11.9,36.1 13.1,36.1 9.5,37.3 12.5,37.3 9.3,38.5 12.7,38.5 9.5,39.7 12.5,39.7
NetC4_MD2_1: C4_MD2.1 U1_MD2.6 | length 3.2
  Top Layer w0.3: v2(24.1,24.8) 24.3,24.8 24.275,24.825 U1_MD2.6@24.275,23.25
  Bottom Layer w0.3: v2(24.1,24.8) 24.2,24.8 C4_MD2.1@24.2,23.5
NetC4_MD2_2: C4_MD2.2 J2_MD2.1 Q2_MD2.S Q4_MD2.D U1_MD2.4 | length 16.9
  Top Layer w0.3: v2(23.8,25.9) 23.1,26.6 23.1,31.3 26.068,34.268 Q4_MD2.D@26.2,34.268 Q4_MD2.D@27.3,34.268 ; U1_MD2.4@25.575,23.25 25.575,24.401 25.8,24.626 v2(25.8,25)
  Bottom Layer w0.3: v2(23.8,25.9) 24.05,25.65 25.15,25.65 v2(25.8,25) 25.8,23.7 C4_MD2.2@25.6,23.5
  other v1: 24.4,32.5 25.6,32.5 26.8,32.5 28,32.5 24.4,33.7 25.6,33.7 26.8,33.7 28,33.7 24.4,34.9 25.6,34.9 26.8,34.9 28,34.9 24.4,36.1 25.6,36.1 26.8,36.1 28,36.1 24.4,37.3 27.4,37.3 24.2,38.5 27.6,38.5 24.4,39.7 27.4,39.7
NetC4_MD3_1: C4_MD3.1 U1_MD3.6 | length 3.2
  Top Layer w0.3: v2(39,24.8) 39.2,24.8 39.175,24.825 U1_MD3.6@39.175,23.25
  Bottom Layer w0.3: v2(39,24.8) 39.1,24.8 C4_MD3.1@39.1,23.5
NetC4_MD3_2: C4_MD3.2 J2_MD3.1 Q2_MD3.S Q4_MD3.D U1_MD3.4 | length 16.9
  Top Layer w0.3: v2(38.7,25.9) 38,26.6 38,31.3 40.968,34.268 Q4_MD3.D@41.1,34.268 Q4_MD3.D@42.2,34.268 ; U1_MD3.4@40.475,23.25 40.475,24.401 40.7,24.626 v2(40.7,25)
  Bottom Layer w0.3: v2(38.7,25.9) 38.95,25.65 40.05,25.65 v2(40.7,25) 40.7,23.7 C4_MD3.2@40.5,23.5
  other v1: 39.3,32.5 40.5,32.5 41.7,32.5 42.9,32.5 39.3,33.7 40.5,33.7 41.7,33.7 42.9,33.7 39.3,34.9 40.5,34.9 41.7,34.9 42.9,34.9 39.3,36.1 40.5,36.1 41.7,36.1 42.9,36.1 39.3,37.3 42.3,37.3 39.1,38.5 42.5,38.5 39.3,39.7 42.3,39.7
NetC4_MD4_1: C4_MD4.1 U1_MD4.6 | length 3.2
  Top Layer w0.3: v2(62.5,24.8) 62.7,24.8 62.675,24.825 U1_MD4.6@62.675,23.25
  Bottom Layer w0.3: v2(62.5,24.8) 62.6,24.8 C4_MD4.1@62.6,23.5